# Altium PCB SM3320-BATT-EV.PcbDoc (part 1 of 2)
Units mm, origin at the board's own origin, x right, y up, seen from the top; angles counter-clockwise.
Board outline 215 x 68 mm, 2 copper layers (Top Layer, Bottom Layer), stack 1.662 mm thick; 180 components, 86 nets, 445 pads, 273 vias.
Unrouted connection lines stored in the file: 7.
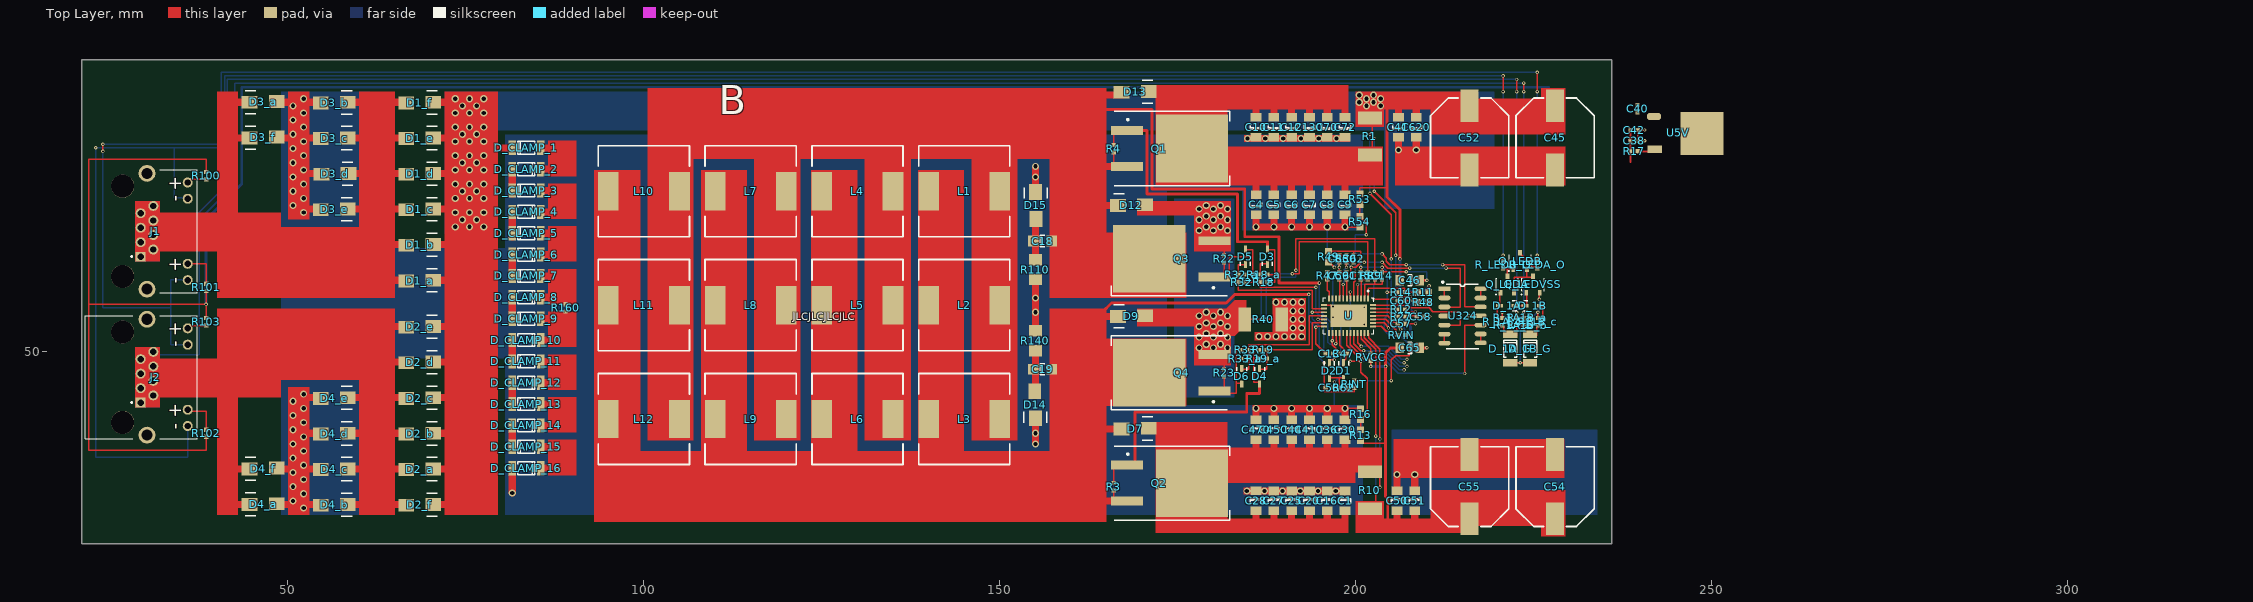
[diagram p0: Top Layer view]
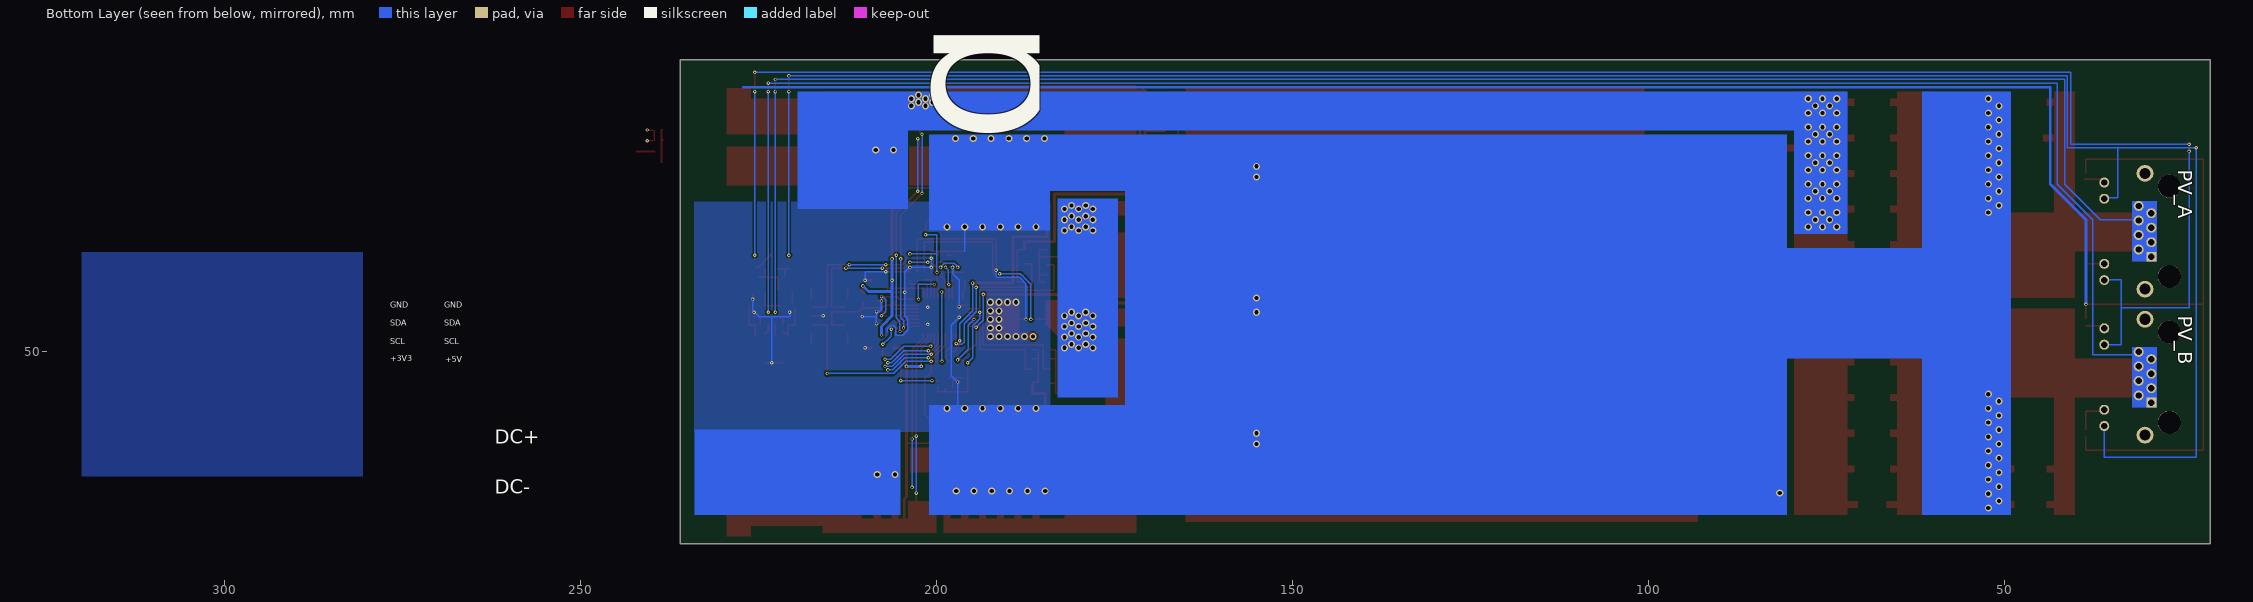
[diagram p1: Bottom Layer view, seen from below]
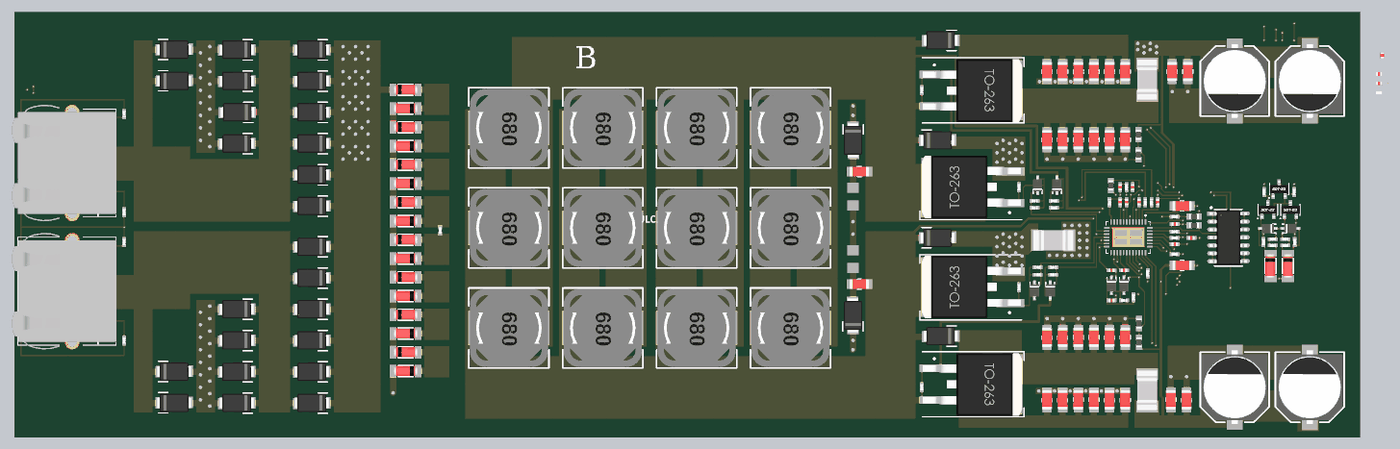
[diagram p3: 3D render of the assembled board from above, using the file's embedded part models]

## Layer stack, top to bottom
Top Solder: solder mask 0.0102, Solder Resist, Dk 3.5
Top Layer: signal copper 0.0711
Dielectric1: core 1.52, FR-4, Dk 4.8
Bottom Layer: signal copper 0.0711
Bottom Solder: solder mask 0.0102, Solder Resist, Dk 3.5

## Board outline
21,23 21,91 236,91.001 236,23

## Design rules (kind name [scope] priority, off if disabled: settings)
Clearance Clearance_12 [(IsRegion AND InNet('VIN_D') AND OnLayer('MidLayer4'))] p1: gap=0.61 ignorepadtopadclearanceinfootprint=FALSE except(0: Arc-Hole Track-Hole SMDPad-Hole THPad-Hole Via-Hole Fill-Hole Poly-Hole Region-Hole Text-Hole)
Clearance Clearance_11 [(IsRegion AND InNet('GND') AND OnLayer('MidLayer3'))] p2 off: gap=0.61 ignorepadtopadclearanceinfootprint=FALSE except(0: Arc-Hole Track-Hole SMDPad-Hole THPad-Hole Via-Hole Fill-Hole Poly-Hole Region-Hole Text-Hole)
Clearance Clearance_10 [InNamedPolygon('Top Layer-No Net 15')] p3: gap=0.635 ignorepadtopadclearanceinfootprint=FALSE except(0: Arc-Hole Track-Hole SMDPad-Hole THPad-Hole Via-Hole Fill-Hole Poly-Hole Region-Hole Text-Hole)
Clearance Clearance_8 [InNamedPolygon('Bottom Layer-No Net 5')] p4: gap=0.635 ignorepadtopadclearanceinfootprint=FALSE except(0: Arc-Hole Track-Hole SMDPad-Hole THPad-Hole Via-Hole Fill-Hole Poly-Hole Region-Hole Text-Hole)
Clearance Clearance_6 [InNamedPolygon('MidLayer1-No Net 5')] p5: gap=0.406 ignorepadtopadclearanceinfootprint=FALSE except(0: Arc-Hole Track-Hole SMDPad-Hole THPad-Hole Via-Hole Fill-Hole Poly-Hole Region-Hole Text-Hole)
Clearance Clearance_13 [InNamedPolygon('MidLayer3-No Net 5')] p6: gap=0.406 ignorepadtopadclearanceinfootprint=FALSE except(0: Arc-Hole Track-Hole SMDPad-Hole THPad-Hole Via-Hole Fill-Hole Poly-Hole Region-Hole Text-Hole)
Clearance Clearance_5 [InNamedPolygon('Top Layer-No Net 16')] p7: gap=0.635 ignorepadtopadclearanceinfootprint=FALSE except(0: Arc-Hole Track-Hole SMDPad-Hole THPad-Hole Via-Hole Fill-Hole Poly-Hole Region-Hole Text-Hole)
Clearance Clearance_3 [InNamedPolygon('Top Layer-No Net 17')] p8: gap=0.635 ignorepadtopadclearanceinfootprint=FALSE except(0: Arc-Hole Track-Hole SMDPad-Hole THPad-Hole Via-Hole Fill-Hole Poly-Hole Region-Hole Text-Hole)
Clearance Clearance_1 [InNamedPolygon('Bottom Layer-No Net 5')] p9: gap=0.635 ignorepadtopadclearanceinfootprint=FALSE except(0: Arc-Hole Track-Hole SMDPad-Hole THPad-Hole Via-Hole Fill-Hole Poly-Hole Region-Hole Text-Hole)
Clearance [InNamedPolygon('MidLayer1-No Net 5')] p10: gap=1.016 ignorepadtopadclearanceinfootprint=FALSE except(0: Arc-Hole Track-Hole SMDPad-Hole THPad-Hole Via-Hole Fill-Hole Poly-Hole Region-Hole Text-Hole)
Clearance HV_NETS [InNetClass('HV_NETS')] p11: gap=0.61 ignorepadtopadclearanceinfootprint=FALSE except(0: Arc-Hole Track-Hole SMDPad-Hole THPad-Hole Via-Hole Fill-Hole Poly-Hole Region-Hole Text-Hole)
Clearance Clearance_2 [All] p12: gap=0.254 ignorepadtopadclearanceinfootprint=FALSE except(0: Arc-Hole Track-Hole SMDPad-Hole THPad-Hole Via-Hole Fill-Hole Poly-Hole Region-Hole Text-Hole)
Clearance Clearance_9 [(InComponent('P1')) vs (OnLayer('Keep-Out Layer'))] p13: gap=0 ignorepadtopadclearanceinfootprint=FALSE
Clearance Clearance_7 [InNamedPolygon('Top Layer-No Net 4')] p14: gap=0.241 ignorepadtopadclearanceinfootprint=FALSE except(0: Arc-Hole Track-Hole SMDPad-Hole THPad-Hole Via-Hole Fill-Hole Poly-Hole Region-Hole Text-Hole)
Clearance Clearance_4 [InNamedPolygon('MidLayer1-No Net')] p15: gap=0.241 ignorepadtopadclearanceinfootprint=FALSE except(0: Arc-Hole Track-Hole SMDPad-Hole THPad-Hole Via-Hole Fill-Hole Poly-Hole Region-Hole Text-Hole)
ComponentClearance [All] p1: gap=0.635 collisioncheckmode=3 verticalgap=0.254 showdistances=FALSE
ComponentClearance ComponentClearance_1 [All] p2: gap=0.254 collisioncheckmode=3 verticalgap=0.254 showdistances=FALSE
DiffPairsRouting DiffPairsRouting_1 [All] p2: maxlimit=0.254 minlimit=0.254 mostfreqgap=0.254 toplayer_minwidth=0.381 toplayer_maxwidth=0.381 toplayer_prefwidth=0.381 bottomlayer_minwidth=0.381 bottomlayer_maxwidth=0.381 bottomlayer_prefwidth=0.381 maxuncoupledlength=12.7
FabricationTestPointUsage TestPointUsage [All] p1: valid=0 allowmultiple=FALSE
FabricationTestPointUsage TestPointUsage_1 [All] p2: valid=0 allowmultiple=FALSE
FabricationTestpoint Testpoint [All] p1: side=3 testpointundercomponent=TRUE minsize=1.016 maxsize=2.54 preferedsize=1.524 minholesize=0 maxholesize=1.016 preferedholesize=0.813 testpointgrid=0.025 allowsidetop=TRUE allowsidebottom=TRUE usegrid=TRUE gridtolerance=0
FabricationTestpoint Testpoint_1 [All] p2: side=3 testpointundercomponent=TRUE minsize=1.016 maxsize=2.54 preferedsize=1.524 minholesize=0 maxholesize=1.016 preferedholesize=0.813 testpointgrid=0.025 allowsidetop=TRUE allowsidebottom=TRUE usegrid=TRUE gridtolerance=0
FanoutControl Fanout_LCC [IsLCC] p1: bgadir=Out bgaviamode=Centered fanoutstyle=Auto fanoutdirection=Alternating viagrid=0.025 // Fanout_LCC (Default Rule)
FanoutControl Fanout_BGA [IsBGA] p2: bgadir=Out bgaviamode=Centered fanoutstyle=Auto fanoutdirection=Alternating viagrid=0.025 // Fanout_BGA (Default Rule)
FanoutControl Fanout_Default [All] p4: bgadir=Out bgaviamode=Centered fanoutstyle=Auto fanoutdirection=Alternating viagrid=0.025 // Fanout_Default (Default Rule)
FanoutControl Fanout_Small [(CompPinCount < 5)] p5: bgadir=Out bgaviamode=Centered fanoutstyle=Auto fanoutdirection=OutThenIn viagrid=0.025 // Fanout_Small (Default Rule)
FanoutControl Fanout_BGA_1 [IsBGA] p6: bgadir=Out bgaviamode=Centered fanoutstyle=Auto fanoutdirection=Alternating viagrid=0.025 // Fanout_BGA (Default Rule)
FanoutControl Fanout_LCC_1 [IsLCC] p7: bgadir=Out bgaviamode=Centered fanoutstyle=Auto fanoutdirection=Alternating viagrid=0.025 // Fanout_LCC (Default Rule)
FanoutControl Fanout_SOIC_1 [IsSOIC] p8: bgadir=Out bgaviamode=Centered fanoutstyle=Auto fanoutdirection=Alternating viagrid=0.025 // Fanout_SOIC (Default Rule)
FanoutControl Fanout_Small_1 [(CompPinCount < 5)] p9: bgadir=Out bgaviamode=Centered fanoutstyle=Auto fanoutdirection=OutThenIn viagrid=0.025 // Fanout_Small (Default Rule)
FanoutControl Fanout_Default_1 [All] p10: bgadir=Out bgaviamode=Centered fanoutstyle=Auto fanoutdirection=Alternating viagrid=0.025 // Fanout_Default (Default Rule)
Height Height_1 [All] p2: minheight=0 maxheight=25.4 prefheight=12.7
HoleSize [All] p1: absolutevalues=TRUE maxlimit=6.375 minlimit=0.198 maxpercent=80.000 minpercent=20.000
HoleSize HoleSize_1 [All] p2: absolutevalues=TRUE maxlimit=2.54 minlimit=0.025 maxpercent=80.000 minpercent=20.000
LayerPairs LayerPairs_1 [All] p2: enforce=TRUE
MinimumAnnularRing [All] p1: minimumring=0.203
PasteMaskExpansion PasteMaskExpansion_1 [All] p2: expansion=0
PlaneClearance PlaneClearance_1 [All] p2: clearance=0.508
PlaneConnect [All] p1: planeconnectstyle=Relief reliefexpansion=0.254 reliefentries=4 reliefconductorwidth=0.203 reliefairgap=0.254
PolygonConnect PolygonConnect_12 [All vs IsNamedPolygon('Top Layer-No Net 4') Or  IsNamedPolygon('Top Layer-GND') Or  IsNamedPolygon('Vout') Or  IsNamedPolygon('Top Layer-No Net 4') Or  IsNamedPolygon('Top Layer-No Net 4') Or  IsNamedPolygon('Top Layer-No Net 4') Or  IsNamedPolygon('Top Layer-No Net 4') Or  IsNamedPolygon('Top Layer-No Net 4') Or  IsNamedPolygon('Top Layer-No Net 4') Or  IsNamedPolygon('Top Layer-No Net 4') Or  IsNamedPolygon('Top Layer-No Net 4') Or  IsNamedPolygon('Top Layer-No Net 4') Or  IsNamedPolygon('Top Layer-No Net 4') Or  IsNamedPolygon('Top Layer-No Net 4') Or  IsNamedPolygon('MidLayer1-No Net') Or  IsNamedPolygon('Top Layer-No Net 4') Or  IsNamedPolygon('Top Layer-No Net 4') Or  IsNamedPolygon('Top Layer-No Net 4') Or  IsNamedPolygon('Top Layer-No Net 4') Or  IsNamedPolygon('Top Layer-No Net 4') Or  IsNamedPolygon('Top Layer-No Net 3') Or  IsNamedPolygon('Top Layer-No Net 4') Or  IsNamedPolygon('Top Layer-No Net 4') Or  IsNamedPolygon('Top Layer-No Net 4') Or  IsNamedPolygon('Top Layer-No Net 4') Or  IsNamedPolygon('Top Layer-No Net 3') Or  IsNamedPolygon('Top Layer-No Net 4') Or  IsNamedPolygon('Top Layer-No Net 4') Or  IsNamedPolygon('Top Layer-No Net 1') Or  IsNamedPolygon('Top Layer-No Net 4') Or  IsNamedPolygon('Top Layer-No Net 4') Or  IsNamedPolygon('Top Layer-No Net 4') Or  IsNamedPolygon('Top Layer-No Net 2') Or  IsNamedPolygon('Top Layer-No Net 4') Or  IsNamedPolygon('Top Layer-No Net 4') Or  IsNamedPolygon('Top Layer-No Net 4') Or  IsNamedPolygon('Top Layer-No Net 4') Or  IsNamedPolygon('Top Layer-No Net') Or  IsNamedPolygon('Top Layer-No Net 4')] p1: connectstyle=Direct reliefconductorwidth=0.254 reliefentries=4 polygonreliefangle="90 Angle" airgapwidth=0.254
PolygonConnect PolygonConnect_11 [All vs IsNamedPolygon('Vout') Or  IsNamedPolygon('MidLayer1-No Net')] p2: connectstyle=Direct reliefconductorwidth=0.254 reliefentries=4 polygonreliefangle="90 Angle" airgapwidth=0.254
PolygonConnect PolygonConnect_10 [All vs IsNamedPolygon('Top Layer-No Net 4')] p3: connectstyle=Direct reliefconductorwidth=0.254 reliefentries=4 polygonreliefangle="90 Angle" airgapwidth=0.254
PolygonConnect PolygonConnect_9 [All vs IsNamedPolygon('Top Layer-No Net 4')] p4: connectstyle=Direct reliefconductorwidth=0.254 reliefentries=4 polygonreliefangle="90 Angle" airgapwidth=0.254
PolygonConnect PolygonConnect_8 [All vs IsNamedPolygon('Top Layer-No Net') Or  IsNamedPolygon('MidLayer1-No Net') Or  IsNamedPolygon('Top Layer-No Net 4')] p5: connectstyle=Direct reliefconductorwidth=0.254 reliefentries=4 polygonreliefangle="90 Angle" airgapwidth=0.254
PolygonConnect PolygonConnect_7 [All vs IsNamedPolygon('Top Layer-No Net') Or  IsNamedPolygon('Top Layer-No Net 3') Or  IsNamedPolygon('MidLayer1-No Net')] p6: connectstyle=Direct reliefconductorwidth=0.254 reliefentries=4 polygonreliefangle="90 Angle" airgapwidth=0.254
PolygonConnect PolygonConnect_6 [All vs IsNamedPolygon('Top Layer-No Net 2') Or  IsNamedPolygon('MidLayer1-No Net') Or  IsNamedPolygon('Top Layer-No Net')] p7: connectstyle=Direct reliefconductorwidth=0.254 reliefentries=4 polygonreliefangle="90 Angle" airgapwidth=0.254
PolygonConnect PolygonConnect_5 [All vs IsNamedPolygon('Top Layer-No Net') Or  IsNamedPolygon('Top Layer-No Net 1') Or  IsNamedPolygon('MidLayer1-No Net')] p8: connectstyle=Direct reliefconductorwidth=0.254 reliefentries=4 polygonreliefangle="90 Angle" airgapwidth=0.254
PolygonConnect PolygonConnect_4 [All vs IsNamedPolygon('MidLayer1-No Net') Or  IsNamedPolygon('Top Layer-No Net')] p9: connectstyle=Direct reliefconductorwidth=0.254 reliefentries=4 polygonreliefangle="90 Angle" airgapwidth=0.254
PolygonConnect PolygonConnect_3 [All vs IsNamedPolygon('Top Layer-No Net') Or  IsNamedPolygon('Top Layer-GND')] p10: connectstyle=Direct reliefconductorwidth=0.254 reliefentries=4 polygonreliefangle="90 Angle" airgapwidth=0.254
PolygonConnect PolygonConnect_2 [All vs IsNamedPolygon('Top Layer-No Net')] p11: connectstyle=Direct reliefconductorwidth=0.254 reliefentries=4 polygonreliefangle="90 Angle" airgapwidth=0.254
PolygonConnect [All] p12: connectstyle=Direct reliefconductorwidth=0.203 reliefentries=4 polygonreliefangle="90 Angle" airgapwidth=0.254
PolygonConnect PolygonConnect_1 [All] p13: connectstyle=Direct reliefconductorwidth=0.254 reliefentries=4 polygonreliefangle="90 Angle" airgapwidth=0.254
RoutingPriority RoutingPriority_1 [All] p2: routingpriority=0
RoutingTopology RoutingTopology_1 [All] p2: topology=Shortest
RoutingVias [All] p1: holewidth=0.406 width=0.813 viastyle="Through Hole" minholewidth=0.254 minwidth=0.635 maxholewidth=0.508 maxwidth=1.016
ShortCircuit ShortCircuit_1 [All] p2: allowed=FALSE
SilkToSolderMaskClearance SilkscreenOverComponentPads [IsPad] p1: minsilkscreentomaskgap=0.127 clearancetoexposedcopper=TRUE
SolderMaskExpansion SolderMaskExpansion_2 [(IsVia And (HoleDiameter  < 15))] p1: expansion=-0.356
SolderMaskExpansion [All] p2: expansion=0.051
SolderMaskExpansion SolderMaskExpansion_1 [All] p3: expansion=0.051
UnRoutedNet UnRoutedNet_1 [All] p2:
Width [All] p1: maxlimit=2.54 minlimit=0.152 preferedwidth=0.254
20 further rules are at their usual default settings.

## Components (designator, comment, footprint, x,y, rotation, side; value= is the part's Value field where it differs from the comment)
C1 "1206B105K101NT" C_1206#1 198.497,28.995 r270 top value=1uF
C4 "1206B105K101NT" C_1206#1 186.003,70.605 r90 top value=1uF
C5 "1206B105K101NT" C_1206#1 188.5,70.6 r90 top value=1uF
C6 "1206B105K101NT" C_1206#1 191,70.6 r90 top value=1uF
C7 "1206B105K101NT" C_1206#1 193.5,70.6 r90 top value=1uF
C8 "1206B105K101NT" C_1206#1 196,70.6 r90 top value=1uF
C9 "1206B105K101NT" C_1206#1 198.5,70.6 r90 top value=1uF
C10 "1206B105K101NT" C_1206#1 186,81.5 r90 top value=1uF
C11 "1206B105K101NT" C_1206#1 188.5,81.5 r90 top value=1uF
C12 "1206B105K101NT" C_1206#1 191,81.5 r90 top value=1uF
C13 "CL05B224KO5NNNC" C_0402 196.3,49.7 r0 top value=220nF
C14 "0402B102K500NT" C_0402 203.7,60.6 r90 top value=1nF
C15 "0402B102K500NT" C_0402 200.7,60.6 r90 top value=1nF
C16 "1206B105K101NT" C_1206#1 195.997,28.995 r270 top value=1uF
C18 "1206B102K202NT" C_1206#2 156,65.5 r0 top value=1nF
C19 "1206B102K202NT" C_1206#2 156,47.5 r0 top value=1nF
C20 "1206B105K101NT" C_1206#1 193.497,28.995 r270 top value=1uF
C25 "1206B105K101NT" C_1206#1 190.997,28.995 r270 top value=1uF
C27 "1206B105K101NT" C_1206#1 188.497,28.995 r270 top value=1uF
C28 "1206B105K101NT" C_1206#1 186,29 r270 top value=1uF
C30 "1206B105K101NT" C_1206#1 198.5,39 r270 top value=1uF
C36 "1206B105K101NT" C_1206#1 195.997,38.995 r270 top value=1uF
C38 "CL05A106MQ5NUNC" C_0402 239.1,79.6 r180 top value=10uF
C40 "CL05A105KA5NQNC" C_0402 239.6,84.1 r90 top value=1uF
C41 "1206B105K101NT" C_1206#1 206,81.5 r90 top value=1uF
C42 "CL05A106MQ5NUNC" C_0402 239.1,81.1 r180 top value=10uF
C44 "1206B105K101NT" C_1206#1 190.997,38.995 r270 top value=1uF
C45 "VZH470M2ATR-1010" C_CAN_1010 228,80 r90 top value=47uF
C46 "1206B105K101NT" C_1206#1 207.6,60 r180 top value=1uF
C47 "CL05B224KO5NNNC" C_0402 198.3,49.7 r0 top value=220nF
C50 "1206B105K101NT" C_1206#1 205.8,29 r270 top value=1uF
C51 "1206B105K101NT" C_1206#1 208.3,29 r270 top value=1uF
C52 "VZH470M2ATR-1010" C_CAN_1010 216,80 r90 top value=47uF
C54 "VZH470M2ATR-1010" C_CAN_1010 228,31 r270 top value=47uF
C55 "VZH470M2ATR-1010" C_CAN_1010 216,31 r270 top value=47uF
C56 "CL05A106MQ5NUNC" C_0402 196.3,44.9 r180 top value=10uF
C57 "CL05A106MQ5NUNC" C_0402 206.4,53.9 r180 top value=10uF
C58 "CL05A106MQ5NUNC" C_0402 209.1,54.9 r180 top value=10uF
C59 "CL05A105KA5NQNC" C_0402 197.7,60.6 r270 top value=1uF
C60 "CL05A105KA5NQNC" C_0402 206.4,57.1 r180 top value=1uF
C61 "CL05A105KA5NQNC" C_0402 198.7,60.6 r270 top value=1uF
C62 "0402CG101J500NT" C_0402 199.7,63 r270 top
C63 "CL05B332KB5NNNC" C_0402 197.7,63 r90 top value=3.3nF
C65 "1206B105K101NT" C_1206#1 207.6,50.5 r180 top value=1uF
C70 "1206B105K101NT" C_1206#1 196,81.5 r90 top value=1uF
C72 "1206B105K101NT" C_1206#1 198.5,81.5 r90 top value=1uF
C130 "1206B105K101NT" C_1206#1 193.5,81.5 r90 top value=1uF
C410 "1206B105K101NT" C_1206#1 193.497,38.995 r270 top value=1uF
C450 "1206B105K101NT" C_1206#1 188.497,38.995 r270 top value=1uF
C470 "1206B105K101NT" C_1206#1 185.997,38.995 r270 top value=1uF
C620 "1206B105K101NT" C_1206#1 208.5,81.5 r90 top value=1uF
D1 "N4148WS" SOD-323 198.3,47.3 r270 top
D1_a "SS210" DO-214AC 68.5,60 r180 top
D1_b "SS210" DO-214AC 68.5,65 r180 top
D1_c "SS210" DO-214AC 68.5,70 r180 top
D1_d "SS210" DO-214AC 68.5,75 r180 top
D1_e "SS210" DO-214AC 68.5,80 r180 top
D1_f "SS210" DO-214AC 68.5,85 r180 top
D2 "N4148WS" SOD-323 196.3,47.3 r270 top
D2_a "SS210" DO-214AC 68.5,33.5 r180 top
D2_b "SS210" DO-214AC 68.5,38.5 r180 top
D2_c "SS210" DO-214AC 68.5,43.5 r180 top
D2_d "SS210" DO-214AC 68.5,48.5 r180 top
D2_e "SS210" DO-214AC 68.5,53.5 r180 top
D2_f "SS210" DO-214AC 68.5,28.5 r180 top
D3 "N4148WS" SOD-323 187.6,63.3 r90 top
D3_a "SS210" DO-214AC 46.5,85 r0 top
D3_b "SS210" DO-214AC 56.5,85 r180 top
D3_c "SS210" DO-214AC 56.5,80 r180 top
D3_d "SS210" DO-214AC 56.6,75 r180 top
D3_e "SS210" DO-214AC 56.5,70 r180 top
D3_f "SS210" DO-214AC 46.5,80 r0 top
D4 "N4148WS" SOD-323 186.5,46.5 r270 top
D4_a "SS210" DO-214AC 46.5,28.5 r0 top
D4_b "SS210" DO-214AC 56.5,28.5 r180 top
D4_c "SS210" DO-214AC 56.5,33.5 r180 top
D4_d "SS210" DO-214AC 56.5,38.5 r180 top
D4_e "SS210" DO-214AC 56.5,43.5 r180 top
D4_f "SS210" DO-214AC 46.5,33.5 r0 top
D5 "N4148WS" SOD-323 184.5,63.3 r90 top
D6 "N4148WS" SOD-323 184,46.5 r270 top
D7 "SS210" DO-214AC 169,39.2 r180 top
D9 "SS210" DO-214AC 168.5,54.9 r0 top
D12 "SS210" DO-214AC 168.5,70.5 r0 top
D13 "SS210" DO-214AC 169,86.5 r180 top
D14 "SS210" DO-214AC 155,42.5 r90 top
D15 "SS210" DO-214AC 155,70.5 r270 top
D_1A "N4148WS" SOD-323 221.3,56.4 r180 top
D_1A_G "ZMM5V6-M" DO-213AA 221.7,50.4 r270 top
D_1B "N4148WS" SOD-323 224.9,56.4 r0 top
D_1B_G "ZMM5V6-M" DO-213AA 224.5,50.4 r270 top
D_CLAMP_1 "ZMM5V6-M" DO-213AA 83.5,78.6 r0 top
D_CLAMP_2 "ZMM5V6-M" DO-213AA 83.5,75.6 r180 top
D_CLAMP_3 "ZMM5V6-M" DO-213AA 83.5,72.6 r0 top
D_CLAMP_4 "ZMM5V6-M" DO-213AA 83.5,69.6 r180 top
D_CLAMP_5 "ZMM5V6-M" DO-213AA 83.5,66.6 r0 top
D_CLAMP_6 "ZMM5V6-M" DO-213AA 83.5,63.6 r180 top
D_CLAMP_7 "ZMM5V6-M" DO-213AA 83.5,60.6 r0 top
D_CLAMP_8 "ZMM5V6-M" DO-213AA 83.5,57.6 r180 top
D_CLAMP_9 "ZMM5V6-M" DO-213AA 83.5,54.6 r0 top
D_CLAMP_10 "ZMM5V6-M" DO-213AA 83.5,51.6 r180 top
D_CLAMP_11 "ZMM5V6-M" DO-213AA 83.5,48.6 r0 top
D_CLAMP_12 "ZMM5V6-M" DO-213AA 83.5,45.6 r180 top
D_CLAMP_13 "ZMM5V6-M" DO-213AA 83.5,42.6 r0 top
D_CLAMP_14 "ZMM5V6-M" DO-213AA 83.5,39.6 r180 top
D_CLAMP_15 "ZMM5V6-M" DO-213AA 83.5,36.6 r0 top
D_CLAMP_16 "ZMM5V6-M" DO-213AA 83.5,33.6 r180 top
J1 "2-406549-1" TE_2-406549-1 29.305,63.297 r270 top
J2 "2-406549-1" TE_2-406549-1 29.305,42.797 r270 top
L1 "SWRB1207S-221MT" SRR1260 145,72.5 r180 top value=220uH
L2 "SWRB1207S-221MT" SRR1260 145,56.5 r180 top value=220uH
L3 "SWRB1207S-221MT" SRR1260 145,40.5 r180 top value=220uH
L4 "SWRB1207S-221MT" SRR1260 130,72.5 r180 top value=220uH
L5 "SWRB1207S-221MT" SRR1260 130,56.5 r180 top value=220uH
L6 "SWRB1207S-221MT" SRR1260 130,40.5 r180 top value=220uH
L7 "SWRB1207S-221MT" SRR1260 115,72.5 r180 top value=220uH
L8 "SWRB1207S-221MT" SRR1260 115,56.5 r180 top value=220uH
L9 "SWRB1207S-221MT" SRR1260 115,40.5 r180 top value=220uH
L10 "SWRB1207S-221MT" SRR1260 100,72.5 r180 top value=220uH
L11 "SWRB1207S-221MT" SRR1260 100,56.5 r180 top value=220uH
L12 "SWRB1207S-221MT" SRR1260 100,40.5 r180 top value=220uH
Q1 "IRF9540NSTRLPBF" TO-263-3 174.079,78.5 r0 top
Q2 "IRF9540NSTRLPBF" TO-263-3 174.079,31.5 r0 top
Q3 "IRF9540NSTRLPBF" TO-263-3 173.921,63 r180 top
Q4 "IRF9540NSTRLPBF" TO-263-3 173.921,47 r180 top
Q_LEDA "2N7002" TO-236AB 221.3,59.4 r90 top
Q_LEDB "2N7002" TO-236AB 223.1,62.7 r90 top
Q_LEDVSS "2N7002" TO-236AB 224.9,59.4 r90 top
R1 "1m" R_2512 202,80.2 r90 top
R3 "0402WGF1002TCE" R_0402 166,31 r270 top value=10k
R4 "0402WGF1002TCE" R_0402 166,78.5 r90 top value=10k
R8 "0402WGF100JTCE" R_0402 201.7,60.6 r90 top value=10R
R9 "0402WGF100JTCE" R_0402 202.7,60.6 r90 top value=10R
R10 "1m" R_2512 202,30.5 r270 top
R11 "0603WAF100KT5E" R_0603 209.5,58.3 r0 top value=100k
R12 "0402WGF1002TCE" R_0402 206.4,55.9 r180 top value=10k
R13 "0603WAF100KT5E" R_0603 200.7,38.2 r270 top value=100k
R14 "0402WGF2202TCE" R_0402 206.4,58.3 r0 top value=22k
R16 "0603WAF1002T5E" R_0603 200.7,41.2 r270 top value=10k
R17 "0402WGF0000TCE" R_0402 239.1,78.1 r180 top value=0R
R18 "0402WGF100JTCE" R_0402 187.1,59.7 r0 top value=10R
R18_a "0402WGF100JTCE" R_0402 187.1,60.8 r0 top value=10R
R19 "0402WGF100JTCE" R_0402 187,50.2 r0 top value=10R
R19_a "0402WGF100JTCE" R_0402 187,49 r0 top value=10R
R22 "0402WGF1002TCE" R_0402 181.5,63 r270 top value=10k
R23 "0402WGF1002TCE" R_0402 181.5,47 r90 top value=10k
R27 "0402WGF1003TCE" R_0402 206.4,54.9 r0 top value=100k
R32 "0402WGF100JTCE" R_0402 184,59.7 r0 top value=10R
R32_a "0402WGF100JTCE" R_0402 184,60.8 r0 top value=10R
R33 "0402WGF100JTCE" R_0402 184.492,50.2 r0 top value=10R
R33_a "0402WGF100JTCE" R_0402 184.492,49 r0 top value=10R
R40 "1m" R_2512 187,54.5 r0 top
R47 "0402WGF2203TCE" R_0402 196,60.6 r270 top value=220k
R48 "0603WAF1002T5E" R_0603 209.5,56.9 r0 top value=10k
R49 "0603WAF1002T5E" R_0603 196.2,63.3 r270 top value=10k
R50 "0402WGF5602TCE" R_0402 198.7,63 r270 top value=56k
R53 "0603WAF100KT5E" R_0603 200.6,71.4 r90 top value=100k
R54 "0603WAF1002T5E" R_0603 200.6,68.2 r90 top value=10k
R62 "0402WGF100JTCE" R_0402 198.3,44.9 r0 top value=10R
R100 "0402WGF1000TCE" R_0402 38.5,74.7 r270 top value=100R
R101 "0402WGF1000TCE" R_0402 38.5,59 r90 top value=100R
R102 "0402WGF1000TCE" R_0402 38.5,38.5 r90 top value=100R
R103 "0402WGF1000TCE" R_0402 38.5,54.2 r270 top value=100R
R110 "1206W4F100JT5E" R_1206 155,61.5 r90 top value=10R
R140 "1206W4F100JT5E" R_1206 155,51.5 r270 top value=10R
R160 "0402WGF0000TCE" R_0402 89,56.1 r90 top value=0R
R_1A_a "0402WGF4702TCE" R_0402 222.108,54.7 r180 top value=47k
R_1A_b "0402WGF4702TCE" R_0402 222.1,53.7 r0 top value=47k
R_1A_c "0402WGF1003TCE" R_0402 220.6,54.2 r270 top value=100k
R_1B_a "0402WGF4702TCE" R_0402 224.1,54.7 r0 top value=47k
R_1B_b "0402WGF4702TCE" R_0402 224.1,53.7 r180 top value=47k
R_1B_c "0402WGF1003TCE" R_0402 225.6,54.2 r270 top value=100k
R_LEDA_O "0402WGF0000TCE" R_0402 225.5,62.2 r90 top value=0R
R_LEDB_O "0402WGF0000TCE" R_0402 220.7,62.2 r90 top value=0R
RINT "0402WGF0000TCE" R_0402 199.8,45.4 r270 top value=0R
RVCC "0402WGF0000TCE" R_0402 202.1,49.2 r270 top value=0R
RVIN "0402WGF0000TCE" R_0402 206.4,52.3 r0 top value=0R
U "LT8705IUHF#TRPBF" QFN-39-P0.5MM 199,55 r270 top
U5V "L78M05ABDT-TR" TO-252AA 248.65,80.6 r0 top
U324 "LM324" SOIC-14-P1.27-W3.5 215,55 r0 top

## Footprints (in the part's own frame and the unit in brackets; to place one, negate y for a bottom-side part, rotate by r counter-clockwise, add the part's x,y. Pads: shape width x height; smd on the part's side, far side on the other; paste and mask are expansions set on the pad)
C_0402 [mm] "Chip Capacitor; Body 1.0 x 0.5 mm (LxW typ)"
  rect 0.6x0.6 smd: 1(-0.508,0) 2(0.508,0)
  body extent -0.5,-0.3 0.5,0.3, height 0.2
C_1206#1 [mm] "Chip Capacitor; Body 3.2 x 1.6 mm (LxW typ)"
  rect 1.2x1.5 smd: 1(-1.395,0) 2(1.395,0)
  silkscreen extent -0.3,-0.8 0.3,0.8, body extent -1.6,-0.8 1.6,0.8, height 1
C_1206#2 [mm] "Chip Capacitor; Body 3.2 x 1.6 mm (LxW typ)"
  rect 1.5x1.5 smd: 1(-1.295,0) 2(1.295,0)
  silkscreen extent -0.3,-0.8 0.3,0.8, body extent -1.6,-0.8 1.6,0.8, height 1
C_CAN_1010 [mm] "SMD-ECAP-10x10"
  rect 4.6x2.5 smd: 1(-4.5,0) 2(4.5,0)
  silkscreen extent -5.6,-5.5 5.6,5.5, body extent -5.9,-5.25 5.9,5.25, height 10.3
DO-213AA [mm] "2 Leads"
  rect 1.1x2 smd: 1(-2,0) 2(2,0)
  silkscreen extent -1.2,-0.9 1.2,0.9, body extent -1.85,-0.8 1.85,0.8, height 1.61
DO-214AC [mm] "SMA Diode"
  rect 2.2x1.8 smd: 1(-1.9,0) 2(1.9,0.1)
  silkscreen extent -2.5,-1.6 -1,1.65, body extent -2.8,-1.48 2.8,1.47, height 2.9
QFN-39-P0.5MM [mm]
  rrect25% 0.86x0.27 smd: 1(-2.435,2.75) 2(-2.435,2.25) 3(-2.435,1.75) 4(-2.435,1.25) 5(-2.435,0.75) 6(-2.435,0.25) 7(-2.435,-0.25) 8(-2.435,-0.75) 9(-2.435,-1.25) 10(-2.435,-1.75) 11(-2.435,-2.25) 12(-2.435,-2.75) 20(2.435,-2.75) 21(2.435,-2.25) 22(2.435,-1.75) 23(2.435,-1.25) 24(2.435,-0.75) 25(2.435,-0.25) 26(2.435,0.25) 27(2.435,0.75) 28(2.435,1.25) 29(2.435,1.75) 30(2.435,2.25) 31(2.435,2.75)
  rrect25% 0.27x0.86 smd: 13(-1.5,-3.435) 14(-1,-3.435) 15(-0.5,-3.435) 16(0,-3.435) 17(0.5,-3.435) 18(1,-3.435) 19(1.5,-3.435) 32(1.5,3.435) 33(1,3.435) 34(0.5,3.435) 35(0,3.435) 36(-0.5,3.435) 37(-1,3.435) 38(-1.5,3.435)
  rect 3.15x5.15 smd paste-4: 39(0,0)
  silkscreen extent -3.59,-3.55 2.55,3.55
R_0402 [mm] "Body 1.0 x 0.5 mm (LxW typ)"
  rect 0.6x0.6 smd: 1(-0.508,0) 2(0.508,0)
  body extent -0.5,-0.25 0.5,0.25, height 0.35
R_0603 [mm] "Body 1.6 x 0.8 mm (LxW typ)"
  rect 0.93x0.98 smd: 1(-0.77,0) 2(0.77,0)
  body extent -0.82,-0.41 0.83,0.41, height 0.46
R_1206 [mm] "Body 3.2 x 1.6 mm (LxW typ)"
  rect 1.6x1.8 smd: 1(-1.4,0) 2(1.4,0)
  body extent -1.91,-0.76 1.91,0.76, height 1
R_2512 [mm] "VISHAY SHUNT RESISTOR"
  rect 1.8x3.4 smd: 1(-2.6,0) 2(2.6,0)
  body extent -3.17,-1.57 3.17,1.6, height 1.22
SOD-323 [mm] "SOD-323/SC-76; 2 Leads; Body 1.7 x 1.3 mm, (LxW)"
  rect 1x0.45 smd: 1(-1.1,0) 2(1.1,0)
  silkscreen extent -1.3,-0.7 -0.7,0.7, body extent -1.43,-0.74 1.43,0.76, height 1.12
SOIC-14-P1.27-W3.5 [mm]
  rect 1.7x0.65 smd: 1(-2.54,3.78)
  oval 1.7x0.65 smd: 2(-2.54,2.51) 3(-2.54,1.24) 4(-2.54,-0.03) 5(-2.54,-1.3) 6(-2.54,-2.57) 7(-2.54,-3.84) 8(2.55,-3.8) 9(2.55,-2.55) 10(2.55,-1.3) 11(2.55,0) 12(2.55,1.25) 13(2.55,2.5) 14(2.55,3.8)
  silkscreen extent -2.9,-4.6 2.25,4.86, body extent -3,-4.45 3,4.35, height 1.7
SRR1260 [mm] "High Current Inductors"
  rect 2.9x5.4 smd: 1(-5,0) 2(5,0)
  silkscreen extent -6.4,-6.4 6.4,6.4, body extent -6.25,-6.25 6.25,6.25, height 6.29
TE_2-406549-1 [mm]
  rect 1.398x1.398 hole 0.89: 1(0,0)
  round 1.398 hole 0.89: 2(-1.02,1.78) 3(-2.04,0) 4(-3.06,1.78) 5(-4.08,0) 6(-5.1,1.78) 7(-6.12,0) 8(-7.14,1.78) 9(3.28,6.61) 10(0.99,6.61) 11(-8.15,6.61) 12(-10.44,6.61)
  round 2.355 hole 1.57: S1(-11.71,0.89) S2(4.55,0.89)
  round 3.25 hole 3.25 unplated: ""(-9.93,-2.54) ""(2.77,-2.54)
  silkscreen extent -12.21,-1.37 5.05,7.93, body extent -12.9,-8.76 5.74,7.96, height 14.6
TO-236AB [mm] "SOT-23-3 Leads; Body 3.1 x 3 mm, inc. leads (LxW max)"
  rect 0.8x0.55 smd: 1(-1.15,0.95) 2(-1.15,-0.95) 3(1.15,0)
  silkscreen extent -1.45,-1.55 0.9,1.65, body extent -1.28,-1.5 1.27,1.5, height 1
TO-252AA [mm] "DPAK"
  oct 2x1 smd: 1(-6.75,2.4)
  rect 6x6 smd: 2(0,0)
  rect 2x1 smd: 3(-6.65,-2.2)
  body extent -7.41,-3.26 3.01,3.46, height 2.39
TO-263-3 [mm] "D2PAK"
  rect 4.5x1.25 smd: 1(-6.223,2.54) 3(-6.223,-2.54)
  rect 10.16x9.5 smd: 2(2.921,0)
  silkscreen extent -8.02,-5.21 8.25,5.21, body extent -7.94,-5.05 7.94,4.95, height 4.3

## Part data
C1 C4 C5 C6 C7 C8 C9 C10 C11 C12 C16 C20 C25 C27 C28 C30 C36 C41 C44 C46 C50 C51 C65 C70 C72 C130 C410 C450 C470 C620: "C - CAPACITOR - MLCC - 1uF - 100V - 1206 - X7R", JLC Availability=Extended, LCSC Part #=C91151, WVDC=100
C13 C47: "C - CAPACITOR - MLCC - 220nF - 16V - 0402", JLC Availability=Basic, LCSC Part #=C16772, WVDC=16
C14 C15: "C - CAPACITOR - MLCC - 1nF - 50V - 0402", JLC Availability=Basic, LCSC Part #=C1523, WVDC=50
C18 C19: "C - CAPACITOR - MLCC - 1nF - 2000V - 1206 - X7R", JLC Availability=Basic, LCSC Part #=C9196, WVDC=2000
C38 C42 C56 C57 C58: "C - CAPACITOR - MLCC - 10uF - 6.3V - 0402", JLC Availability=Basic, LCSC Part #=C15525, WVDC=6.3
C40 C59 C60 C61: "C - CAPACITOR - MLCC - 1uF - 25V - 0402", JLC Availability=Basic, LCSC Part #=C52923, WVDC=16
C45 C52 C54 C55: "C - CAPACITOR - ELECTROLYTIC - 47uF - 100V", JLC Availability=Extended, LCSC Part #=C164068, ESR=40mOhm, WVDC=100
C62: "C - CAPACITOR - MLCC - 100pF - 50V - 0402", JLC Availability=Extended, LCSC Part #=C1546
C63: "C - CAPACITOR - MLCC - 3.3nF - 50V - 0402", JLC Availability=Basic, LCSC Part #=C26404, WVDC=50
D1 D2 D3 D4 D5 D6 D_1A D_1B: "D - DIODE - FAST TRR - 100V - 150mA - 4ns", JLC Availability=Basic, LCSC Part #=C2128, If=150mA, PIV=100V, Trr=4ns
D1_a D1_b D1_c D1_d D1_e D1_f D2_a D2_b D2_c D2_d D2_e D2_f D3_a D3_b D3_c D3_d D3_e D3_f D4_a D4_b D4_c D4_d D4_e D4_f D7 D9 D12 D13 D14 D15: "D - DIODE - SCHOTTKY - 100V - 2A", JLC Availability=Extended, LCSC Part #=C14996, If=2A, Vrrm=100
D_1A_G D_1B_G D_CLAMP_1 D_CLAMP_2 D_CLAMP_3 D_CLAMP_4 D_CLAMP_5 D_CLAMP_6 D_CLAMP_7 D_CLAMP_8 D_CLAMP_9 D_CLAMP_10 D_CLAMP_11 D_CLAMP_12 D_CLAMP_13 D_CLAMP_14 D_CLAMP_15 D_CLAMP_16: "D - DIODE - ZENER - 5.6V - 500mW", JLC Availability=BASIC, LCSC Part #=C8062
J1 J2: "J - JACK - ETHERNET - Right - THT", JLC Availability=Extended, LCSC Part #=C125068
L1 L2 L3 L4 L5 L6 L7 L8 L9 L10 L11 L12: "L - INDUCTOR - 220uH - 1.6A - 12.5mm", JLC Availability=Extended, LCSC Part #=C169380, Isat=1.6A
Q1 Q2 Q3 Q4: "Q - TRANSISTOR - MOSFET (N) - 250V - 33A - 0.094R", JLC Availability=Extended, LCSC Part #=C33903, WVDC=100
Q_LEDA Q_LEDB Q_LEDVSS: "Q - TRANSISTOR - MOSFET (N) - 60V - 200mW", JLC Availability=Basic, LCSC Part #=C8545, WVDC=60
R1 R10 R40: library part EWSL2512F1L00S9, "R - RESISTOR - SMD - 0.001R - 1% - 2512 - 2W - 50ppm/k", JLC Availability=Extended, LCSC Part #=C349153, Power=2W, ComponentLink1Description=http://riedon.com/media/pdf/CSR.pdf, ComponentLink1URL=http://riedon.com/media/pdf/CSR.pdf
R3 R4 R12 R22 R23: "R - RESISTOR - SMD - 10k - 1% - 0402", JLC Availability=Basic, LCSC Part #=C25744
R8 R9 R18 R18_a R19 R19_a R32 R32_a R33 R33_a R62: "R - RESISTOR - SMD - 10R - 1% - 0402", JLC Availability=Basic, LCSC Part #=C25077
R11 R13 R53: "R - RESISTOR - SMD - 100k - 1% -  0603", JLC Availability=Basic, LCSC Part #=C22936
R14: "R - RESISTOR - SMD - 22k - 1% - 0402", JLC Availability=Basic, LCSC Part #=C25768
R16 R48 R49 R54: "R - RESISTOR - SMD - 10k - 1% - 0603", JLC Availability=Basic, LCSC Part #=C25804
R17 R160 R_LEDA_O R_LEDB_O RINT RVCC RVIN: "R - RESISTOR - SMD - 0R - 1% - 0402", JLC Availability=Basic, LCSC Part #=C17168
R27 R_1A_c R_1B_c: "R - RESISTOR - SMD - 100k - 1% -  0402", JLC Availability=Basic, LCSC Part #=C25741
R47: "R - RESISTOR - SMD - 220k - 1% - 0402", JLC Availability=Basic, LCSC Part #=C25767
R50: "R - RESISTOR - SMD - 56k - 1% - 0402", JLC Availability=Basic, LCSC Part #=C25796
R100 R101 R102 R103: "R - RESISTOR - SMD - 100R - 1% - 0402", JLC Availability=Basic, LCSC Part #=C25076
R110 R140: "R - RESISTOR - SMD - 10R - 1% - 1206", JLC Availability=Basic, LCSC Part #=C17903
R_1A_a R_1A_b R_1B_a R_1B_b: "R - RESISTOR - SMD - 47k - 1% - 0402", JLC Availability=Basic, LCSC Part #=C25792
U: "DC/DC Cntrlr Single-OUT Step Down/Step Up 400kHz Automotive 38-Pin QFN EP T/R", LCSC Part #=C674170, Package="QFN -38 Analog Devices", Availability=Extended, DigiKey-Purchase-URL=https://snapeda.com/shop?store=DigiKey&id=4330144, MF="Analog Devices", MP=LT8705AIUHF#TRPBF, SnapEDA_Link=https://www.snapeda.com/parts/LT8705IUHF%23TRPBF/Analog%20Devices/view-part/4330144/?ref=snap
U5V: "U - IC - 5V Power Regulator", JLC Availability=Basic, LCSC Part #=C58069, VOut=5.0
U324: library part AP2127K-3.3TRG1, "U - IC - OP AMP (QUAD)", JLC Availability=Basic, LCSC Part #=C71035, Speed=0.4V/us

## Via types
v1: diameter 1, hole 0.6, Top Layer to Bottom Layer, tented both sides, 168 vias
v2: diameter 0.48, hole 0.254, Top Layer to Bottom Layer, tented both sides, 105 vias

## Nets (pads, with @x,y where several pads share a name; then routed paths per layer and width w, separated by ;. In a path a pad name is that pad's centre, name@x,y a point inside that pad or via, vN(x,y) a via of type N, cw(c..) or ccw(c..) an arc to the next point about the centre after c; other vN are vias at no path point)
1A_GATE: D_1A.2 D_1A_G.1 Q_LEDA.1 R_1A_b.2 R_1A_c.2 | length 9
  Top Layer w0.2: D_1A.2@219.8,56.4 219.9,56.3 219.9,53.692 R_1A_c.2@220.5,53.692 ; D_1A.2@220.2,56.6 Q_LEDA.1@220.2,58.25 ; D_1A_G.1@220.8,52.1 R_1A_c.2@220.8,53.8 ; D_1A_G.1@221.1,52.4 221.3,52.6 D_1A_G.1@221.6,52.6 ; D_1A_G.1@222.6,52.2 R_1A_b.2@222.6,53.9
1B_GATE: D_1B.2 D_1B_G.1 R_1B_b.2 R_1B_c.2 | length 6.9
  Top Layer w0.2: R_1B_b.2@223.6,53.9 223.6,52.8 D_1B_G.1@224,52.4 ; D_1B_G.1@224.1,52.5 D_1B_G.1@224.2,52.6 ; D_1B_G.1@225.4,52.2 R_1B_c.2@225.4,53.9 ; R_1B_c.2@225.6,53.692 226.3,53.692 D_1B.2@226.3,56.4
10VDC: C40.2 U5V.1
+3V3: R100.1 R101.1 R102.1 R103.1 U324.4 | length 314.3
  Top Layer w0.2: R102.1@38.5,38 38.5,36.1 22,36.1 22,56.6 ; R103.1@38.5,54.608 v2(38.5,56.6) ; R101.1@38.5,58.5 v2(38.5,56.6) ; R100.1@38.5,75.1 38.5,77 22,77 22,56.6 ; 22,56.6 v2(38.5,56.6)
  Bottom Layer w0.4: v2(38.5,56.6) 38.5,68.5 43.5,73.5 43.5,87.1 227.1,87.1
+5VDC: C38.2 C42.2 R17.2 | length 4.6
  Top Layer w0.3: 238.592,76.6 R17.2@238.592,78.1 C38.2@238.592,79.6 238.592,79.608 C42.2@238.592,81.1
  Top Layer w0.4: C38.2@238.5,79.7 C38.2@238.592,79.608
BG1: D5.1 R32.1 R32_a.1 U.14 | length 19.5
  Top Layer w0.2: D5.1@184.5,62.2 183.6,62.2 ; U.14@195.7,56 U.14@195.565,56 193.9,56 193.9,58.6 183.5,58.6 183.5,62.1 ; 183.5,62.1 183.6,62.2 ; 183.5,62.1 183.5,62.2 183.6,62.2
BG2: D6.1 R33.2 R33_a.2 U.16 | length 19.3
  Top Layer w0.2: D6.1@184,47.5 185,47.5 R33_a.2@185,49 R33.2@185,50.2 185,50.9 193.5,50.9 193.5,55 U.16@195.565,55 U.16@195.8,55
BOOST1: C47.2 D1.1 U.23 | length 4.6
  Top Layer w0.2: U.23@197.75,52.565 197.75,50.85 198.6,50 198.6,49 198.3,48.7 D1.1@198.3,48.4
BOOST2: C13.2 D2.1 U.17 | length 9.3
  Top Layer w0.2: v2(194.7,54.5) U.17@195.565,54.5 ; D2.1@196.3,48.4 D2.1@196.3,48.8 ; D2.1@196.3,48.7 D2.1@196.3,48.8 ; v2@196.9,48.8 D2.1@196.3,48.8 ; v2(197,48.8) C13.2@197,49.492
  Bottom Layer w0.2: v2(194.7,54.5) 195.5,53.7 195.5,50.3 v2(197,48.8)
CLKOUT: U.10
CSN: C14.1 R9.1 U.2 | length 5.9
  Top Layer w0.2: U.2@201.25,57.435 201.25,59.35 201.3,59.4 ; 201.25,59.4 201.3,59.4 ; R9.1@202.5,60.092 202.7,59.892 202.7,59.4 ; C14.1@203.5,59.9 203.7,59.9 203.7,59.4 202.7,59.4 ; 201.3,59.4 202.7,59.4
CSNIN: C4.2 C5.2 C6.2 C7.2 C8.2 C9.2 C10.2 C11.2 C12.2 C70.2 C72.2 C130.2 D13.1 Q1.2 R1.1 U.32 | length 35
  Top Layer w0.2: R1.1@202.3,78.2 202.3,79.6 v2(202.6,79.9) ; U.32@202.435,53.5 203.6,53.5 204.3,52.8 v2(205.1,52.8) ; v2(202.6,72.5) 205.6,69.5 v2(205.6,63.5)
  Top Layer w1: D13.1@170.9,86.5 171.1,86.3 172.4,86.3
  Bottom Layer w0.2: v2(202.6,72.5) v2(202.6,79.9) v2@202.6,80 ; v2(205.1,52.8) 205.1,54.2 205.6,54.7 v2(205.6,63.5)
CSP: C15.1 R8.1 U.3 | length 3.9
  Top Layer w0.2: C15.1@200.5,60.1 C15.1@200.75,60.1 ; C15.1@200.7,60.2 200.75,60.15 C15.1@200.75,60.1 ; U.3@200.75,57.435 C15.1@200.75,60.1 ; R8.1@201.6,60.092 201.6,60.1 C15.1@200.75,60.1
CSPOUT: C1.2 C16.2 C20.2 C25.2 C27.2 C28.2 C30.2 C36.2 C44.2 C410.2 C450.2 C470.2 D7.1 Q2.2 R10.1 U.31 | length 26.4
  Top Layer w0.2: 185.6,36.5 186,36.9 C470.2@186,38.005 ; U.31@201.8,52.565 201.8,51.9 203.4,50.3 203.4,41.9 v2@203.4,37.6 ; v2(203.4,30.9) 203.4,33 R10.1@203.6,33
  Bottom Layer w0.2: v2@203.4,30.8 v2(203.4,30.9) v2@203.4,37.6
  other v2: 203.4,37.7
EXTVCC: RVCC.1 U.29 | length 3.3
  Top Layer w0.2: U.29@200.75,52.565 200.75,51.75 202.1,50.4 RVCC.1@202.1,49.8
FBIN: R53.1 R54.2 U324.12 U.5 | length 39.7
  Top Layer w0.2: U.5@199.75,57.435 199.75,59.75 199.9,59.9 v2(199.9,61.1) ; R53.1@200.6,70.63 R54.2@200.6,68.97 200.6,68.8 R54.2@200.7,68.8 ; R54.2@200.8,68.8 201.5,68.1 v2(201.5,66.4) ; v2(203.7,63.7) 204.3,63.1 204.3,62.7 204.8,62.2 v2(207.1,62.2) ; v2(212.2,62.2) 215.3,62.2 215.3,56.25 U324.12@217.55,56.25
  Bottom Layer w0.2: v2(199.9,61.1) 199.9,63.7 ; v2(201.5,66.4) 199.9,66.4 199.9,63.7 ; v2(203.7,63.7) 199.9,63.7 ; v2(207.1,62.2) v2(212.2,62.2)
FBIN_B: U324.13 U324.14 | length 1.3
  Top Layer w0.2: U324.14@217.5,58.7 217.55,58.7 U324.13@217.55,57.5
FBOUT: R13.1 R16.2 U324.10 U.6 | length 47.2
  Top Layer w0.2: v2(199.2,48.6) v2(200.7,48.6) 200.7,47.1 201.6,46.2 201.6,41.2 R16.2@200.7,40.3 ; U.6@199.25,57.435 v2(199.25,58.35) ; R13.1@200.7,38.9 R13.1@200.7,38.97 R16.2@200.7,40.3 ; R16.2@200.7,40.392 R16.2@200.7,40.3 ; v2(215.3,46.9) 215.3,53.7 U324.10@217.55,53.7
  Bottom Layer w0.2: v2@199.25,48.5 v2(199.25,58.35) ; v2(200.7,48.6) 204.3,48.6 206,46.9 v2(215.3,46.9)
FBOUT_B: U324.8 U324.9 | length 1.3
  Top Layer w0.2: U324.9@217.5,52.4 217.55,52.4 U324.8@217.55,51.2
GATEVCC: C56.2 R62.2 RINT.2 U.15 | length 19.1
  Top Layer w0.2: v2(193.9,55.5) U.15@195.565,55.5 ; v2(195.6,48.4) 195.6,44.3 198.8,44.3 ; R62.2@198.7,44.8 198.8,44.7 198.8,44.3 ; RINT.2@199.9,45 199.8,44.9 RINT.2@199.8,44.892 199.8,44.3 198.8,44.3
  Bottom Layer w0.2: v2(193.9,55.5) 193.9,54.6 194.9,53.6 194.9,49.1 v2(195.6,48.4)
GATEVCC_R: D1.2 D2.2 R62.1 | length 3.4
  Top Layer w0.2: D2.2@196.3,46.3 D1.2@198.3,46.3 ; R62.1@197.7,44.9 197.7,46.3
GND: C1.1 C4.1 C5.1 C6.1 C7.1 C8.1 C9.1 C10.1 C11.1 C12.1 C14.2 C15.2 C16.1 C20.1 C25.1 C27.1 C28.1 C30.1 C36.1 C38.1 C40.1 C41.1 C42.1 C44.1 C45.1 C46.1 C50.1 C51.1 C52.1 C54.1 C55.1 C56.1 C57.1 C58.1 C59.1 C60.1 C61.1 C62.1 C63.1 C65.1 C70.1 C72.1 C130.1 C410.1 C450.1 C470.1 C620.1 D3_a.2 D3_b.2 D3_c.2 D3_d.2 D3_e.2 D3_f.2 D4_a.2 D4_b.2 D4_c.2 D4_d.2 D4_e.2 D4_f.2 D14.1 D15.1 D_1A_G.2 D_1B_G.2 D_CLAMP_16.2 Q_LEDVSS.2 R9.2 R12.1 R14.1 R16.1 R40.2 R47.1 R48.1 R49.1 R54.1 R110.1 R140.1 R_1A_c.1 R_1B_c.1 U5V.2 U324.11 U.13 U.39 | length 145.6
  Top Layer w0.2: v2(187.4,54.5) 189.4,54.5 R40.2@189.4,54.4 ; v2(191.6,61.4) 191.6,65.8 202.7,65.8 R9.2@202.7,61.308 ; U.13@195.565,56.5 196.4,56.5 U.39@197.1,55.8 ; R47.1@196,61.1 196.008,61.108 C59.1@197.7,61.108 ; R49.1@196,64.1 199.7,64.1 ; C56.1@196.892,44.9 197,45.008 v2(197,45.7) ; C63.1@197.7,62.392 v2(197.7,61.8) C59.1@197.7,61.108 ; C63.1@197.7,62.492 C63.1@197.7,62.5 ; C30.1@198.6,40.8 C30.1@198.7,40.7 ; v1@198.6,67.4 198.6,67.43 R54.1@200.6,67.43 ; C61.1@198.7,61.108 C59.1@197.7,61.108 ; v1@198.9,42 R16.1@200.392,42 ; C9.1@198.9,68.8 C9.1@199,68.9 ; C62.1@199.7,63.4 C62.1@199.7,63.508 199.7,64.1 ; C15.2@200.7,61 C15.2@200.7,61.108 v2(200.7,61.8) ; v2(200.7,63.1) 200.7,64.1 199.7,64.1 ; R9.2@202.5,61.108 R9.2@202.7,61.308 ; R9.2@202.7,61.108 R9.2@202.7,61.308 ; C14.2@203.7,61.2 v2(207.1,61.2) ; C14.2@203.7,61.308 v2(203.7,61.8) ; v2@204.3,58.2 v2(204.4,58.3) R14.1@205.892,58.3 205.9,58.3 R14.1@206,58.2 ; R12.1@206.908,55.9 R12.1@207.1,55.9 ; C60.1@206.908,57.1 v2(207.7,57.1) R48.1@208.492,57.1 ; R12.1@207,55.9 207.3,55.6 v2(208.4,55.6) ; C57.1@207.108,54 206.8,54 206.9,53.9 v2(208.4,53.9) ; R48.1@208.592,57.1 R48.1@208.6,57.1 ; C58.1@209.8,54.9 v2(210.4,54.9) ; v2@216,55 U324.11@217.55,55 ; R_1A_c.1@220.6,54.716 v2(220.6,55.5) ; D_1A_G.2@221.5,48.4 D_1A_G.2@221.7,48.4 v2(223.1,48.4) D_1B_G.2@224,48.4 ; R_1B_c.1@225.6,54.716 v2(225.6,55.5) ; v2(225.8,57.3) 225.8,58 Q_LEDVSS.2@226,58.2 ; C38.1@239.6,79.6 C42.1@239.6,81.092 ; C38.1@239.808,79.6 v2(240.6,79.6) ; C42.1@239.808,81.1 v2(240.6,81.1)
  Top Layer w0.4: C65.1@209.1,50.5 v2(210,50.5) ; C46.1@209.1,60 v2(210,60)
  Top Layer w1: v1(81.5,30.1) D_CLAMP_16.2@81.5,33.1
  Bottom Layer w0.2: v2(187.4,54.5) 187.4,59.5 188.3,60.4 191.6,60.4 v2(191.6,61.4) ; 196,64.1 v1@196,67.1 ; v1@196,67.4 v1(196,67.5) v1(198.5,67.5) ; v2(196.8,54.8) 197.9,53.7 197.9,46.6 v2(197,45.7) 197,41.3 197.3,41.3 ; v2(196.8,56.3) 196.8,60 197.7,60.9 v2(197.7,61.8) ; v2(200.7,63.1) v2(200.7,61.8) 200.8,61.9 200.9,61.8 v2(203.7,61.8) 203.7,61.9 204.4,61.2 v2(204.4,58.3) 204.4,55 204,54.6 204,53 204.7,52.3 205.7,52.3 205.7,53.3 206,53.6 206.5,53.6 206.9,53.2 206.9,52.7 ; v2(207.1,61.2) 210,61.2 v2(210,60) v2@210,59.9 ; v2@207.7,57 207.7,55.9 208.4,55.2 208.4,54.9 ; v2(208.4,53.9) 208.4,54.9 ; v2@210.4,55 210.3,54.9 208.4,54.9 ; v2(220.6,55.5) 220.6,54.9 223.1,54.9 ; v2(223.1,48.4) 223.1,54.9 ; v2(225.8,57.3) 225.8,55.8 224.9,54.9 223.1,54.9
  other v1: 52.2,28 50.7,29 52.2,30 184.7,30.4 187.2,30.4 189.7,30.4 192.2,30.4 194.7,30.4 197.2,30.4 50.7,31 52.2,32 205.8,32.7 208.3,32.7 50.7,33 52.2,34 50.7,35 52.2,36 50.7,37 155,37 52.2,38 155,38.5 50.7,39 52.2,40 50.7,41 52.2,42 186,42 188.5,42 191,42 193.5,42 196,42 198.5,42 50.7,43 52.2,44 187.6,52.1 188.8,52.1 190,52.1 191.2,52.1 192.4,52.1 191.2,53.3 192.4,53.3 191.2,54.5 192.4,54.5 155,55.5 191.2,55.7 192.4,55.7 188.8,56.9 190,56.9 191.2,56.9 192.4,56.9 155,57.5 186,67.5 188.5,67.5 191,67.5 193.5,67.5 52.2,69.5 50.7,70.5 52.2,71.5 50.7,72.5 52.2,73.5 50.7,74.5 155,74.5 52.2,75.5 155,76 50.7,76.5 52.2,77.5 206,78.3 208.5,78.3 50.7,78.5 52.2,79.5 184.8,79.9 187.3,79.9 189.8,79.9 192.3,79.9 194.8,79.9 197.3,79.9 50.7,80.5 52.2,81.5 50.7,82.5 52.2,83.5 50.7,84.5 52.2,85.5
  other v2: 201.2,53.8 215.9,55 201.2,56.2
IMON_IN: C60.2 R48.2 U324.5 U.38 | length 17.9
  Top Layer w0.2: U.38@202.435,56.5 205.9,56.5 ; C60.2@205.892,57.1 205.892,56.508 205.9,56.5 ; R48.2@210.3,57 210.3,56.1 ; U324.5@212.8,53.7 214.7,53.7 214.7,55.6 210.8,55.6 210.3,56.1 ; 205.9,56.5 207.2,56.5 207.6,56.1 210.3,56.1
IMON_IN_B: U324.6 U324.7 | length 1.2
  Top Layer w0.2: U324.6@212.46,52.43 212.46,51.24 U324.7@212.5,51.2
IMON_OUT: C61.2 R49.2 U324.3 U.7 | length 31.5
  Top Layer w0.2: R49.2@196.55,62.25 v2(197,61.8) ; C61.2@198.7,59.9 198.75,59.85 U.7@198.75,57.435 ; C61.2@198.7,60.092 198.742,60.092 199.3,60.65 199.3,61.7 v2(199.4,61.8) 200,61.8 200.7,62.5 v2(201.2,62.5) ; C61.2@198.75,59.95 C61.2@198.8,60 ; v2(203.7,62.5) 204.5,61.7 v2(207.6,61.7) ; U324.3@212.7,56.2 214.7,56.2 214.7,61.7 v2(212.7,61.7)
  Bottom Layer w0.2: v2@197,61.9 197.5,62.4 198.85,62.4 199.4,61.85 v2(199.4,61.8) ; v2(201.2,62.5) v2(203.7,62.5) ; v2(207.6,61.7) v2(212.7,61.7)